# EAGLE board battery-check-6V (EAGLE 5.07)
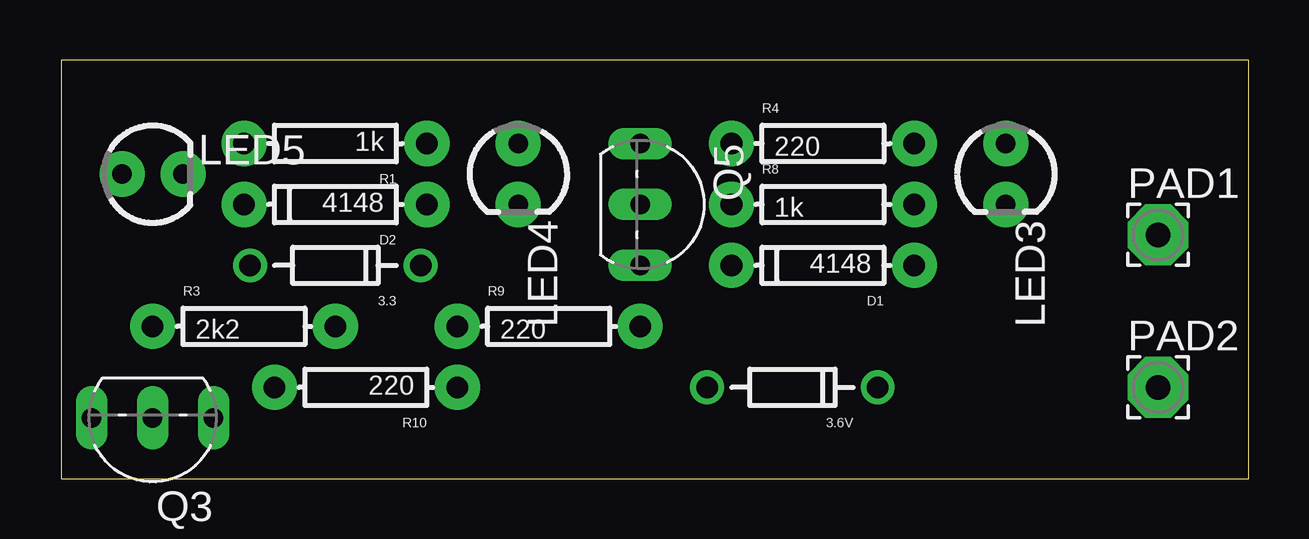
[diagram p0: board, top side]
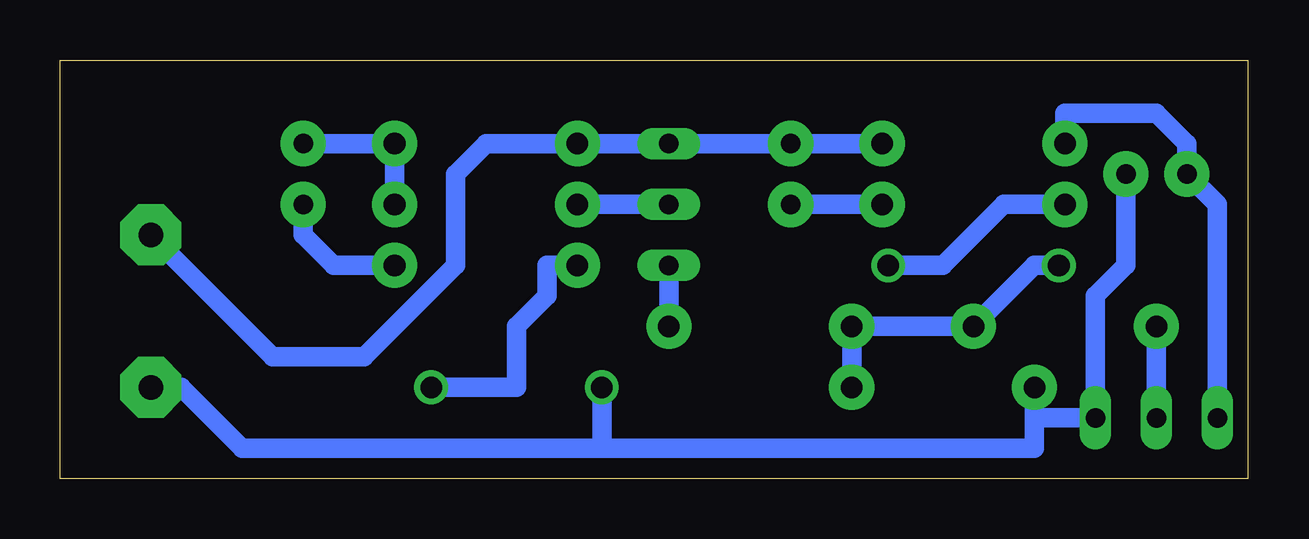
[diagram p1: board, bottom side, seen from below]

Size 49.51 x 17.45 mm. Coordinates in mm from the lower left corner, seen from the top.
Outline: 0,0 49.51,0 49.51,17.45 0,17.45 0,0
Copper layers (1*16): Top 0.035mm / dielectric 1.5mm / Bottom 0.035mm
Design rules "default": minimum track width 10mil, minimum drill 24mil, track to track 8mil, track to pad 8mil, pad to pad 8mil, via to via 8mil, smd to smd 8mil, copper to edge 40mil, drill to drill 8mil, minimum pad ring 10mil, minimum via ring 8mil, stop-mask expansion 4mil, vias tented up to drill 0mil, thermal gap 10mil

## Footprints (pad centres in the part's own frame; a part is rotated, then mirrored left to right if it is on the bottom)
DIODE-ZENER = drill 0.9 round: P$1 -3.556,0; P$2 3.556,0
DIODE-1N4148 = drill 0.9 pad 1.88 round: A -3.81,0; C 3.81,0
LED3MM = drill 0.813 pad 1.88 round: A -1.27,0; K 1.27,0
2,54/1,0 = drill 1.016 pad 2.54 octagon: 1 0,0
TO92-EBC = drill 0.813 long: B 0,-1.27; C 2.54,-1.27; E -2.54,-1.27
AXIAL-0.3 = drill 0.9 pad 1.88 round: P$1 -3.81,0; P$2 3.81,0
TO92-CLP = drill 0.813 octagon: A 0,1.905; C 1.27,0; R -1.27,0

## Placement (x,y rotation side)
3.3  [DIODE-ZENER]  11.43,8.89 180 top
3.6V  [DIODE-ZENER]  30.48,3.81 180 top
D1  4148  [DIODE-1N4148]  31.75,8.89 180 top
D2  4148  [DIODE-1N4148]  11.43,11.43 180 top
LED3  green  [LED3MM]  39.37,12.7 270 top
LED4  yellow  [LED3MM]  19.05,12.7 270 top
LED5  red  [LED3MM]  3.81,12.7 0 top
PAD1  BAT+  [2,54/1,0]  45.72,10.16 0 top
PAD2  BAT-  [2,54/1,0]  45.72,3.81 0 top
Q3  9014  [TO92-EBC]  3.81,1.27 180 top
Q5  9015  [TO92-EBC]  25.4,11.43 270 top
R1  1k  [AXIAL-0.3]  11.43,13.97 180 top
R3  2k2  [AXIAL-0.3]  7.62,6.35 0 top
R4  220  [AXIAL-0.3]  31.75,13.97 0 top
R8  1k  [AXIAL-0.3]  31.75,11.43 0 top
R9  220  [AXIAL-0.3]  20.32,6.35 0 top
R10  220  [AXIAL-0.3]  12.7,3.81 180 top
VR1  TL431  [TO92-CLP]  29.21,-6.35 0 top  (outside the outline)

## Library data of the parts
3.3 3.6V D1 D2 = SparkFun
LED3-LED5 Q3 Q5 R1 R3 R4 R8-R10 = digital-toy
PAD1 PAD2 = wirepad
VR1 = v-reg

## Nets
GND: 3.6V.P$2 LED5.K PAD2.1 Q3.E R10.P$2
N$1: LED4.A PAD1.1 Q5.E R1.P$1 R4.P$1
N$2: D2.A LED4.K
N$3: 3.3.P$2 R3.P$2 R9.P$1 R10.P$1
N$4: Q3.B R3.P$1
N$5: LED5.A Q3.C R1.P$2
N$6: D1.A LED3.K
N$7: 3.6V.P$1 D1.C
N$8: Q5.C R9.P$2
N$9: Q5.B R8.P$1
N$10: LED3.A R4.P$2 R8.P$2
N$11: 3.3.P$1 D2.C

## Tracks (layer width: path | path; a pad name or v marks a point on that pad's centre or on a via)
GND
  Bottom 0.813: LED5.K 5.08,8.89 6.35,7.62 Q3.E 8.89,2.54 | 8.89,2.54 R10.P$2 | PAD2.1 44.45,3.81 41.91,1.27 26.67,1.27 | 26.67,1.27 8.89,1.27 8.89,2.54 | 3.6V.P$2 26.92,1.52 26.67,1.27
N$1
  Bottom 0.813: R1.P$1 LED4.A Q5.E R4.P$1 31.75,13.97 33.02,12.7 33.02,8.89 36.83,5.08 40.64,5.08 PAD1.1
N$2
  Bottom 0.813: D2.A LED4.K
N$3
  Bottom 0.813: 3.3.P$2 8.89,8.89 R3.P$2 R9.P$1 R10.P$1
N$4
  Bottom 0.813: Q3.B R3.P$1
N$5
  Bottom 0.813: Q3.C 1.27,11.43 LED5.A 2.54,13.97 3.81,15.24 7.62,15.24 R1.P$2
N$6
  Bottom 0.813: D1.A 38.1,8.89 39.37,10.16 LED3.K
N$7
  Bottom 0.813: D1.C 29.21,8.89 29.21,7.62 30.48,6.35 30.48,3.81 3.6V.P$1
N$8
  Bottom 0.813: R9.P$2 Q5.C
N$9
  Bottom 0.813: Q5.B R8.P$1
N$10
  Bottom 0.813: R8.P$2 R4.P$2 LED3.A
N$11
  Bottom 0.813: 3.3.P$1 12.7,8.89 10.16,11.43 D2.C